# Altium PCB Automated Plant Watering PCB.PcbDoc
Units mm, origin at the board's own origin, x right, y up, seen from the top; angles counter-clockwise.
Board outline 100 x 50 mm, 2 copper layers (Top Layer, Bottom Layer); 27 components, 16 nets, 78 pads, 0 vias.
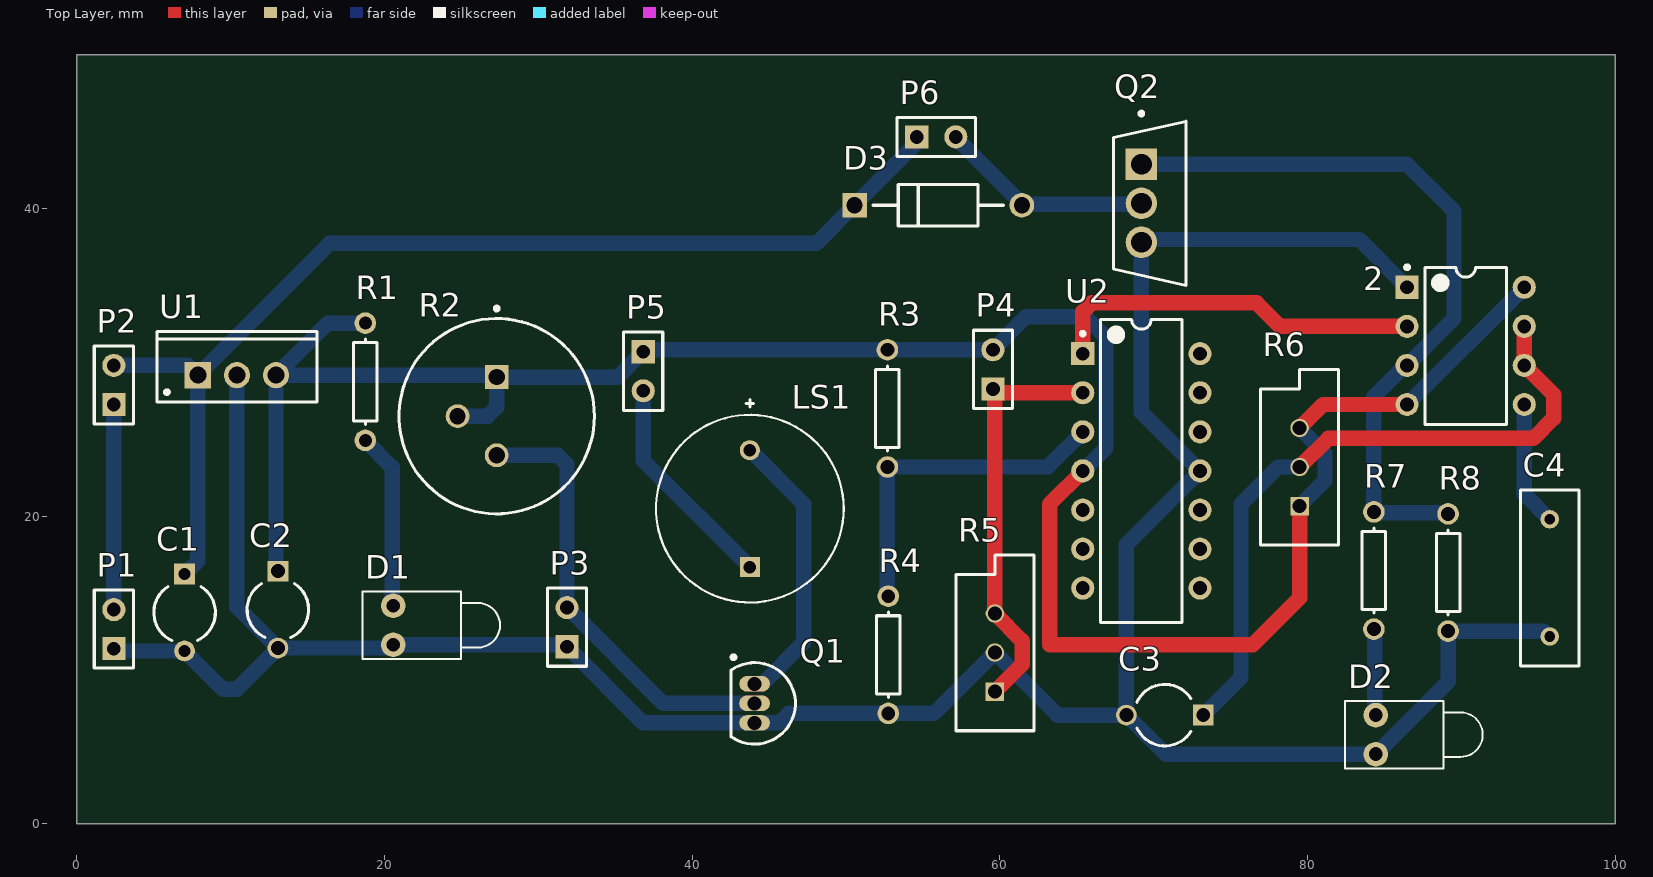
[diagram p0: Top Layer view]
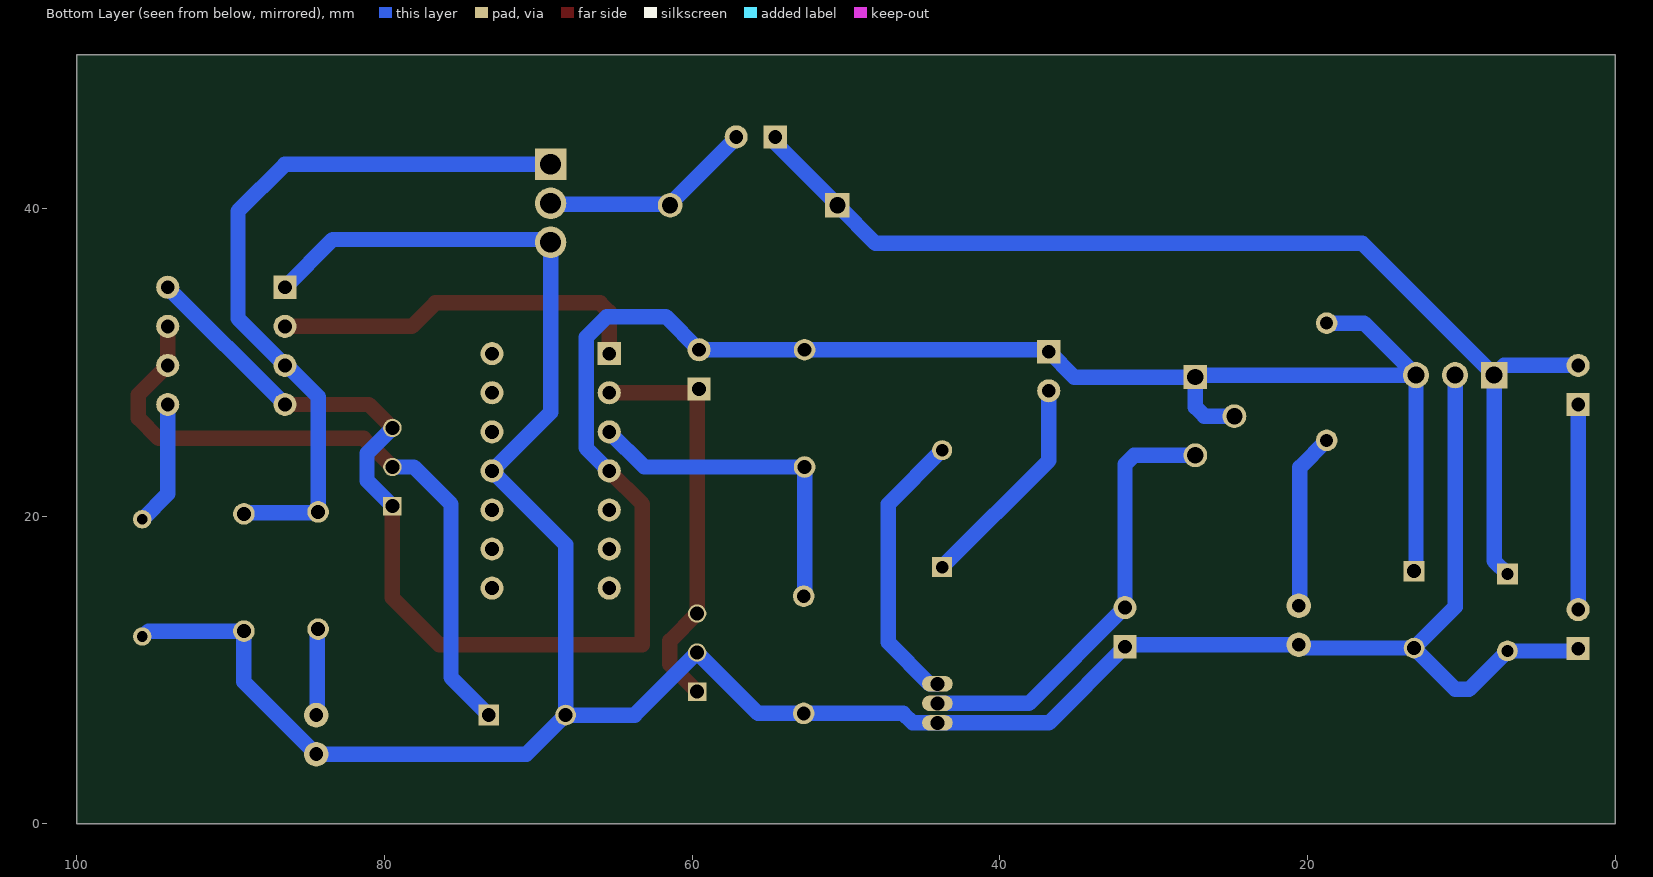
[diagram p1: Bottom Layer view, seen from below]

## Layer stack, top to bottom
Top Solder: solder mask 0.0102, Solder Resist, Dk 3.5
Top Layer: signal copper 0.0356
Dielectric 1: dielectric 0.32, FR-4, Dk 4.8
Bottom Layer: signal copper 0.0356
Bottom Solder: solder mask 0.0102, Solder Resist, Dk 3.5

## Board outline
0,0 100,0 100,50 0,50

## Design rules (kind name [scope] priority, off if disabled: settings)
Clearance [All] p1: gap=0.254 ignorepadtopadclearanceinfootprint=FALSE except(0: Arc-Hole Track-Hole SMDPad-Hole THPad-Hole Via-Hole Fill-Hole Poly-Hole Region-Hole Text-Hole)
PolygonConnect [All] p1: connectstyle=Relief reliefconductorwidth=0.254 reliefentries=4 polygonreliefangle="90 Angle" airgapwidth=0.254
RoutingVias [All] p1: holewidth=0.711 width=1.27 viastyle="Through Hole" minholewidth=0.711 minwidth=1.27 maxholewidth=0.711 maxwidth=1.27
SilkToSolderMaskClearance [All] p1: minsilkscreentomaskgap=0.1 clearancetoexposedcopper=TRUE
SolderMaskExpansion [All] p1: expansion=0.102 istentingtop=FALSE
Width Width_1 [InNet('12V') or InNet('GND')] p1: maxlimit=2 minlimit=0.254 preferedwidth=0.508 minimp=50.000000 maximp=50.000000 favimp=50.000000
Width [All] p2: maxlimit=2 minlimit=0.254 preferedwidth=0.381
29 further rules are at their usual default settings.

## Components (designator, comment, footprint, x,y, rotation, side; value= is the part's Value field where it differs from the comment)
2 "NE555P" P0008A 90.285,31.083 r0 top
C1 "100uF" CAPR5-4X5#1 7,13.75 r270 top
C2 "470uf" CAPR5-4X5#2 13.069,13.938 r270 top value=470uF
C3 "10uF" CAPR5-4X5#2 70.727,7.08 r180 top
C4 "100nF" RAD-0.3 95.75,16 r90 top
D1 "Power LED" LED-1 20.562,12.922 r0 top
D2 "Motor ON" LED-1 84.443,5.81 r0 top
D3 "1N4007- FLYBACK diode" FP-1N4007-MFG 55.995,40.227 r0 top value=15pF
LS1 "AI-1223-TWT-5V-R" FP-AI-1223-TWT-5V-R-MFG 43.75,20.5 r270 top
P1 "12V DC power supply" HDR1X2 2.401,11.398 r90 top
P2 "Power ON switch" HDR1X2 2.401,27.273 r90 top
P3 "Probes 1" HDR1X2 31.865,11.525 r90 top
P4 "Probes 2" HDR1X2 59.551,28.289 r90 top
P5 "Buzzer ON switch" HDR1X2 36.818,30.702 r270 top
P6 "Motor OUT" HDR1X2 54.598,44.672 r0 top
Q1 "NPN" TO-226-AA 44.057,7.842 r180 top
Q2 "FQP30N06" FP-340AT-MFG 69.743,40.349 r0 top
R1 "1K" AXIAL-0.3#1 18.75,28.75 r90 top
R2 "93PR1KLF" BIT-93PR1KLF 27.293,26.511 r270 top
R3 "10K" AXIAL-0.3#2 52.693,27.019 r90 top
R4 "10K" AXIAL-0.3#2 52.75,11 r90 top
R5 "100K" VR5 59.678,11.144 r90 top
R6 "100K" VR5 79.49,23.209 r90 top
R7 "330" AXIAL-0.3#2 84.316,16.478 r90 top
R8 "10K" AXIAL-0.3#2 89.142,16.351 r90 top
U1 "L7809CV" TO220 10.402,29.178 r0 top
U2 "LM324AN" N0014A 69.203,22.955 r0 top

## Footprints (in the part's own frame and the unit in brackets; to place one, negate y for a bottom-side part, rotate by r counter-clockwise, add the part's x,y. Pads: shape width x height; smd on the part's side, far side on the other; paste and mask are expansions set on the pad)
AXIAL-0.3#1 [mm] "Axial Device, Thru-Hole; 2 Leads; 0.3 in Pin Spacing"
  round 1.4 hole 0.85: 1(-3.81,0) 2(3.81,0)
  silkscreen extent -2.77,-0.76 2.77,0.76
AXIAL-0.3#2 [mm] "Axial Device, Thru-Hole; 2 Leads; 0.3 in Pin Spacing"
  round 1.4 hole 0.9: 1(-3.81,0) 2(3.81,0)
  silkscreen extent -2.77,-0.76 2.77,0.76
BIT-93PR1KLF [mm] "Through Hole, 3-Leads, Dia 12.7mm"
  rect 1.55x1.55 hole 1.05: 1(-2.54,0)
  round 1.55 hole 1.05: 2(0,-2.54) 3(2.54,0)
  silkscreen extent -7.12,-6.35 6.35,6.35, body extent -6.35,-6.35 6.35,6.35, height 6.35
CAPR5-4X5#1 [mm] "Capacitor; 2 Leads"
  rect 1.35x1.35 hole 0.8: 1(-2.5,0)
  round 1.35 hole 0.8: 2(2.5,0)
  silkscreen extent -1.69,-2 1.82,2
CAPR5-4X5#2 [mm] "Capacitor; 2 Leads"
  rect 1.35x1.35 hole 0.9: 1(-2.5,0)
  round 1.35 hole 0.9: 2(2.5,0)
  silkscreen extent -1.69,-2 1.82,2
FP-1N4007-MFG [mm]
  rect 1.6x1.6 hole 1.05 paste-1000 mask+0: 1(-5.438,0)
  round 1.6 hole 1.05 paste-1000 mask+0: 2(5.438,0)
  silkscreen extent -4.24,-1.35 4.24,1.35, body extent -6.34,-1.45 6.34,1.45, height 0.25
FP-340AT-MFG [mm]
  rect 2.05x2.05 hole 1.35 paste-1000 mask+0: 1(-0.54,2.535)
  round 2.05 hole 1.35 paste-1000 mask+0: 2(-0.54,0) 3(-0.54,-2.535)
  silkscreen extent -2.35,-5.34 2.35,5.96, body extent -2.45,-5.44 2.45,5.44, height 0.25
FP-AI-1223-TWT-5V-R-MFG [mm]
  rect 1.3x1.3 hole 0.8 paste-1000 mask+0: 1(3.8,0)
  round 1.3 hole 0.8 paste-1000 mask+0: 2(-3.8,0)
  silkscreen extent -7.1,-6.1 6.1,6.1, body extent -6.2,-6.2 6.2,6.2, height 0.25
HDR1X2 [mm] "Connector; Header; 2 Position"
  rect 1.5x1.5 hole 0.9: 1(0,0)
  round 1.5 hole 0.9: 2(2.54,0)
  silkscreen extent -1.27,-1.27 3.81,1.27
LED-1 [mm] "LED; 2 Leads"
  round 1.6 hole 0.9: 1(0,1.27) 2(0,-1.27)
  silkscreen extent -2,-2.2 6.95,2.2
N0014A [mm] "DIP, 14-Leads, Body 19.7x6.6mm, Pitch 2.54mm"
  rect 1.5x1.5 hole 0.9: 1(-3.81,7.62)
  round 1.5 hole 0.9: 2(-3.81,5.08) 3(-3.81,2.54) 4(-3.81,0) 5(-3.81,-2.54) 6(-3.81,-5.08) 7(-3.81,-7.62) 8(3.81,-7.62) 9(3.81,-5.08) 10(3.81,-2.54) 11(3.81,0) 12(3.81,2.54) 13(3.81,5.08) 14(3.81,7.62)
  silkscreen extent -3.93,-9.85 2.65,9.85, body extent -3.95,-9.85 3.95,9.85, height 5.08
P0008A [mm] "DIP, 8-Leads, Body 10.15x6.6mm, Pitch 2.54mm"
  rect 1.5x1.5 hole 0.9: 1(-3.81,3.81)
  round 1.5 hole 0.9: 2(-3.81,1.27) 3(-3.81,-1.27) 4(-3.81,-3.81) 5(3.81,-3.81) 6(3.81,-1.27) 7(3.81,1.27) 8(3.81,3.81)
  silkscreen extent -3.93,-5.1 2.65,5.23, body extent -3.95,-5.07 3.95,5.07, height 5.08
RAD-0.3 [mm] "Radial Cap, Thru-Hole; 2 Leads; 0.3 in Pin Spacing"
  round 1.2 hole 0.7: 1(-3.81,0) 2(3.81,0)
  silkscreen extent -5.71,-1.91 5.71,1.91
TO220 [mm] "TO, Thru-Hole, Vertical, Heatsink Mounted; 3 In-Line Leads; Pitch 2.54 mm"
  rect 1.7x1.7 hole 1.1: 1(-2.54,0)
  round 1.7 hole 1.1: 2(0,0) 3(2.54,0)
  silkscreen extent -5.2,-1.75 5.2,2.85, body extent -5.25,-1.8 5.25,2.9, height 19.7
TO-226-AA [mm] "TO, Flat Index; 3 In-Line, Axial Leads; Body Dia. 4.8mm; Leads 0.55 x 0.51 mm (max)"
  oval 2x1 hole 0.9: 1(0,-1.27) 2(0,0) 3(0,1.27)
  silkscreen extent -2.65,-3.13 1.52,2.65, body extent -2.65,-2.66 1.52,2.66, height 5.33
VR5 [mm] "Thru-Hole; 3 Leads"
  rect 1.2x1.2 hole 0.9: 1(-2.54,0)
  round 1.2 hole 0.9: 2(0,0) 3(2.54,0)
  silkscreen extent -5.08,-2.54 6.35,2.54

## Part data
2: library part CMP-001-0003-1, "IC OSC SINGLE TIMER 100KHZ 8-DIP"
C1 C2 C3: library part Cap2, "Capacitor", PackageDescription="Capacitor; 2 Leads", PackageReference=CAPR5-4X5, Published=23-Sep-2002, Publisher="Altium Limited"
C4: library part Cap, "Capacitor", LatestRevisionDate=17-Jul-2002, LatestRevisionNote="Re-released for DXP Platform.", PackageDescription="Radial Cap, Thru-Hole; 2 Leads; 0.3 in Pin Spacing", PackageReference=RAD-0.3, Published=8-Jun-2000, Publisher="Altium Limited"
D1 D2: library part LED1, "Typical RED GaAs LED", LatestRevisionDate=08-Jul-2005, LatestRevisionNote="Mech Layer 1 removed.", PackageDescription="LED; 2 Leads", PackageReference=LED-1, Published=8-Jun-2000, Publisher="Altium Limited"
D3: library part CMP-02540-000046-1, "DIODE GEN PURP 1KV 1A DO204AL", Capacitance=15pF, Forward Current=1A, Manufacturer=Vishay, Manufacturer Part Number=1N4007-E3/54, Max Junction Temp=+150°C, Max Repetitive Reverse Voltage=1000V, Max Surge Forward Current=30A, Package=1N4007, Peak Reverse Current=30uA, Temperature="-50°C to +150°C", Temperature Range Low=-50°C, Automotive=No, Category=Diode, ComponentLink2Description=Datasheet, ComponentLink2URL=http://www.vishay.com/docs/88503/1n4001.pdf, Device Class L1="Discrete Semiconductors", Device Class L2=Diodes, Device Class L3="Rectifier Diodes", Digikey Description="DIODE GEN PURP 1KV 1A DO204AL", Height=2.7mm, Ipc Land Pattern Name=DIOPA1088W105L520D270, Lead Free=Yes, Mouser Description="Rectifiers Vr/1000V Io/1A", Octopart=https://octopart.com/1n4007-e3%2F54-vishay-39548207, RoHS=TRUE, Temperature Range High=+150°C
LS1: library part CMP-231724-000001-1, "AUDIO MAGNETIC INDICATOR 3-7V TH", Color=Black, Current Rating=30mA, Frequency=2.3kHz, Max Operating Temperature=85°C, Max Supply Voltage=7V, Min Operating Temperature=-40°C, Min Supply Voltage=3V, Nominal Supply Voltage (DC)=5V, Package Quantity=100, Bandwidth=2.3kHz, Contact Plating=Tin, Diameter=12mm, Height=9.5mm, Input Current=30mA, Input Type=DC, Lead Free="Lead Free", Length=12mm, Max Supply Current=30mA, Max Supply Voltage (DC)=7V, Min Supply Voltage (DC)=3V, Mount="Through Hole", Operating Supply Current=30mA, Packaging=Tray, REACH SVHC="No SVHC", Self Resonant Frequency=2.3kHz, Sensing Method=Magnetic, Series=AI, Termination="PC Pins", Voltage Rating (DC)=5V, Washable=Yes, Weight=0.01lb, Width=12mm
P1 P2 P3 P4 P5 P6: library part "Header 2", "Header, 2-Pin", LatestRevisionDate=17-Jul-2002, LatestRevisionNote="Re-released for DXP Platform.", Publisher="Altium Limited"
Q1: "NPN Bipolar Transistor", Code_JEDEC=TO-226-AA, LatestRevisionDate=17-Jul-2002, LatestRevisionNote="Re-released for DXP Platform.", PackageDescription="TO, Flat Index; 3 In-Line, Axial Leads; Body Dia. 4.8mm; Leads 0.55 x 0.51 mm (max)", PackageReference=TO-226-AA, Published=8-Jun-2000, Publisher="Altium Limited"
Q2: library part CMP-013-00037-1, "Power MOSFET, N-Channel, QFET®, 60 V, 30 A, 40 mΩ, TO-220"
R1 R3 R4 R7 R8: library part Res1, "Resistor", LatestRevisionDate=17-Jul-2002, LatestRevisionNote="Re-released for DXP Platform.", PackageDescription="Axial Device, Thru-Hole; 2 Leads; 0.3 in Pin Spacing", PackageReference=AXIAL-0.3, Published=8-Jun-2000, Publisher="Altium Limited"
R2: library part CMP-2000-05711-1, "1/2” Diameter Single Turn Cermet Trimming Potentiometer, 1 KOhm, -55 to 125 degC, 3-Pin THD, RoHS, Bulk", Manufacturer="BI Technologies", Operating Temp Range=-55Cto125C, Package Description="3-Pin Through Hole Device, Dia 12.7mm", Power Rating=1W, Resistance=1000ohm, Temperature Coefficient=?100ppm/?C, Tolerance (+ or -)=10%, Datasheet URL=https://datasheet.ciiva.com/15760/93-15760960.pdf, Datasheet Version=12/2012, DELETED=Compliant, Failure Rate=NotRequired, Manufacturer URL=http://www.bi-technologies.net/, Military Standard=NotRequired, Mounting Style=ThroughHole, Mounting Technology=ThroughHole, Number of Turns=1Turn, Package Reference=93PR1KLF, Packaging=Box, Product Depth (mm)=NotRequiredmm, Product Diameter (mm)=12.7mm, Product Height (mm)=6.35mm, Product Length (mm)=NotRequiredmm, Rad Hardened=No, Shaft Diameter (mm)=6.35mm, Technology=Cermet, Termination Style=Pin, Type=Trimmer
R5 R6: library part RPot, "Potentiometer", LatestRevisionDate=17-Jul-2002, LatestRevisionNote="Re-released for DXP Platform.", PackageDescription="Variable Resistor, Thru-Hole; 3 Leads", PackageReference=VR5, Published=8-Jun-2000, Publisher="Altium Limited", Set Position=0.5, Sim Note="Enter the Resistance value and the set point into parameter fields."
U1: library part CMP-001-0002-1, "IC REG LDO 9V 1.5A TO220AB"
U2: library part CMP-001-0000-1, "Quadruple improved offset operational amplifier 14-PDIP 0 to 70"

## Nets (pads, with @x,y where several pads share a name; then routed paths per layer and width w, separated by ;. In a path a pad name is that pad's centre, name@x,y a point inside that pad or via, vN(x,y) a via of type N, cw(c..) or ccw(c..) an arc to the next point about the centre after c; other vN are vias at no path point)
9V: 2.4 2.8 C2.1 P4.2 P5.1 R1.2 R2.1 R2.2 R3.2 R6.1 R6.3 U1.3 U2.4 | length 150.8
  Top Layer w0.381: R2.1@27.166,29.178 R2.1 ; P5.1 P5.1@36.945,30.829
  Top Layer w1: C2.1@12.942,16.565 C2.1 ; U2.4 63.234,20.796 63.234,11.652 76.442,11.652 79.49,14.7 R6.1 ; R6.3 81.014,27.273 2.4
  Bottom Layer w1: C2.1@12.942,16.565 U1.3 ; R1.2 16.324,32.56 U1.3 ; R2.2 26.707,26.511 27.293,27.097 R2.1 35.167,29.051 P5.1 ; R2.1@27.166,29.178 U1.3 ; P5.1@36.945,30.829 R3.2 P4.2 61.71,32.988 65.546,32.988 66.897,31.637 66.897,24.459 U2.4 ; R6.1 81.141,22.32 81.141,24.098 R6.3 ; 2.4 2.8
12V: C1.1 D3.1 P2.2 P6.1 U1.1 | length 72.9
  Top Layer w1: P2.2 P2.2@2.536,29.813 ; P6.1@54.348,44.422 P6.1
  Bottom Layer w1: P2.2 7.227,29.813 U1.1 ; C1.1 7.862,17.112 U1.1 ; P6.1 54.598,44.268 D3.1 48.08,37.75 16.434,37.75 U1.1
Net2_1: 2.1 C1.2 C2.2 C3.2 C4.1 D1.2 D2.2 P1.1 P3.1 Q1.3 Q2.3 R4.1 R5.2 R8.1 U1.2 U2.11 | length 180.2
  Top Layer w0.381: P1.1 P1.1@2.441,11.438 ; C3.2@67.965,7.08 C3.2 ; R8.1@89.142,12.414 R8.1
  Top Layer w1: D1.2 D1.2@20.677,11.537
  Bottom Layer w0.381: P1.1 P1.1@2.549,11.25
  Bottom Layer w1: P1.1@2.549,11.25 C1.2 9.5,8.75 10.381,8.75 C2.2 ; U1.2 10.402,14.105 C2.2 ; 2.1 83.368,38 69.389,38 Q2.3 69.203,26.765 U2.11 68.227,18.169 C3.2 ; C4.1 95.696,12.19 95.345,12.541 R8.1 89.142,9.239 D2.2 70.767,4.54 C3.2 ; C2.2 20.348,11.438 D1.2 31.738,11.652 P3.1 36.818,6.572 Q1.3 44.073,6.588 45.678,6.588 46.28,7.19 R4.1 55.724,7.19 R5.2 63.742,7.08 C3.2
Net2_2: 2.2 U2.1 | length 24.7
  Top Layer w1: U2.1 65.393,33.291 65.979,33.877 76.696,33.877 78.22,32.353 2.2
Net2_3: 2.3 Q2.1 R7.2 R8.2 | length 48.2
  Top Layer w0.381: R7.2 R7.2@84.379,20.225 ; R8.2@89.078,20.225 R8.2
  Bottom Layer w1: Q2.1 86.485,42.884 89.523,39.846 89.523,32.861 2.3 86.348,29.813 84.316,27.781 R7.2 ; R7.2@84.379,20.225 R8.2@89.078,20.225
Net2_5: 2.5 C4.2 | length 8.3
  Bottom Layer w0.381: 2.5@93.968,27.146 2.5
  Bottom Layer w1: 2.5 94.095,21.465 C4.2
Net2_6: 2.6 2.7 C3.1 R6.2 | length 44.1
  Top Layer w1: R6.2 81.353,25.072 94.688,25.072 96,26.384 96,27.908 2.6 2.7
  Bottom Layer w1: C3.1 75.68,9.533 75.68,20.796 78.093,23.209 R6.2
NetD1_1: D1.1 R1.1 | length 11.5
  Top Layer w0.381: D1.1@20.498,14.256 D1.1
  Bottom Layer w1: R1.1 20.498,23.192 D1.1@20.498,14.256
NetD2_1: D2.1 R7.1 | length 5.6
  Top Layer w0.381: R7.1 R7.1@84.379,12.605 ; D2.1@84.379,7.144 D2.1
  Bottom Layer w1: D2.1@84.379,7.144 R7.1@84.379,12.605
NetD3_2: D3.2 P6.2 Q2.2 | length 14
  Top Layer w0.381: P6.2@57.138,44.597 P6.2 ; D3.2@61.433,40.302 D3.2 D3.2@61.494,40.288 ; Q2.2@69.142,40.288 Q2.2
  Bottom Layer w1: P6.2@57.138,44.597 D3.2@61.433,40.302 ; D3.2@61.494,40.288 Q2.2@69.142,40.288
NetLS1_1: LS1.1 P5.2 | length 14.3
  Bottom Layer w1: P5.2 36.818,23.632 LS1.1
NetLS1_2: LS1.2 Q1.1 | length 19
  Top Layer w1: Q1.1@43.75,9.112 Q1.1 Q1.1@44.523,9.112
  Bottom Layer w1: LS1.2 47.25,20.8 47.25,11.805 44.557,9.112 Q1.1
NetP1_2: P1.2 P2.1 | length 13.3
  Bottom Layer w1: P1.2 P2.1
NetP3_2: P3.2 Q1.2 R2.3 | length 30.1
  Top Layer w1: Q1.2@43.557,7.842 Q1.2 Q1.2@44.549,7.842
  Bottom Layer w1: R2.3@27.152,23.971 31.279,23.971 31.865,23.385 P3.2 31.891,14.065 38.114,7.842 Q1.2 ; R2.3 R2.3@27.322,24
NetP4_1: P4.1 R5.1 R5.3 U2.2 | length 27
  Top Layer w0.381: P4.1 59.678,28.162 P4.1@59.805,28.035
  Top Layer w1: R5.1 61.456,10.382 61.456,11.906 R5.3 P4.1@59.678,28.162 ; P4.1@59.805,28.035 U2.2
NetR3_1: R3.1 R4.2 U2.3 | length 22.1
  Bottom Layer w1: R4.2 52.693,14.867 R3.1 63.107,23.209 U2.3
pads on no net: U2.5 U2.6 U2.7 U2.8 U2.9 U2.10 U2.12 U2.13 U2.14